# Altium PCB STM32F413Nucleo_NT35510__PCB_1.PcbDoc
Units mm, origin at the board's own origin, x right, y up, seen from the top; angles counter-clockwise.
Board outline 113.99 x 80.48 mm, 2 copper layers (Top Layer, Bottom Layer); 10 components, 29 nets, 162 pads, 0 vias.
Unrouted connection lines stored in the file: 54.
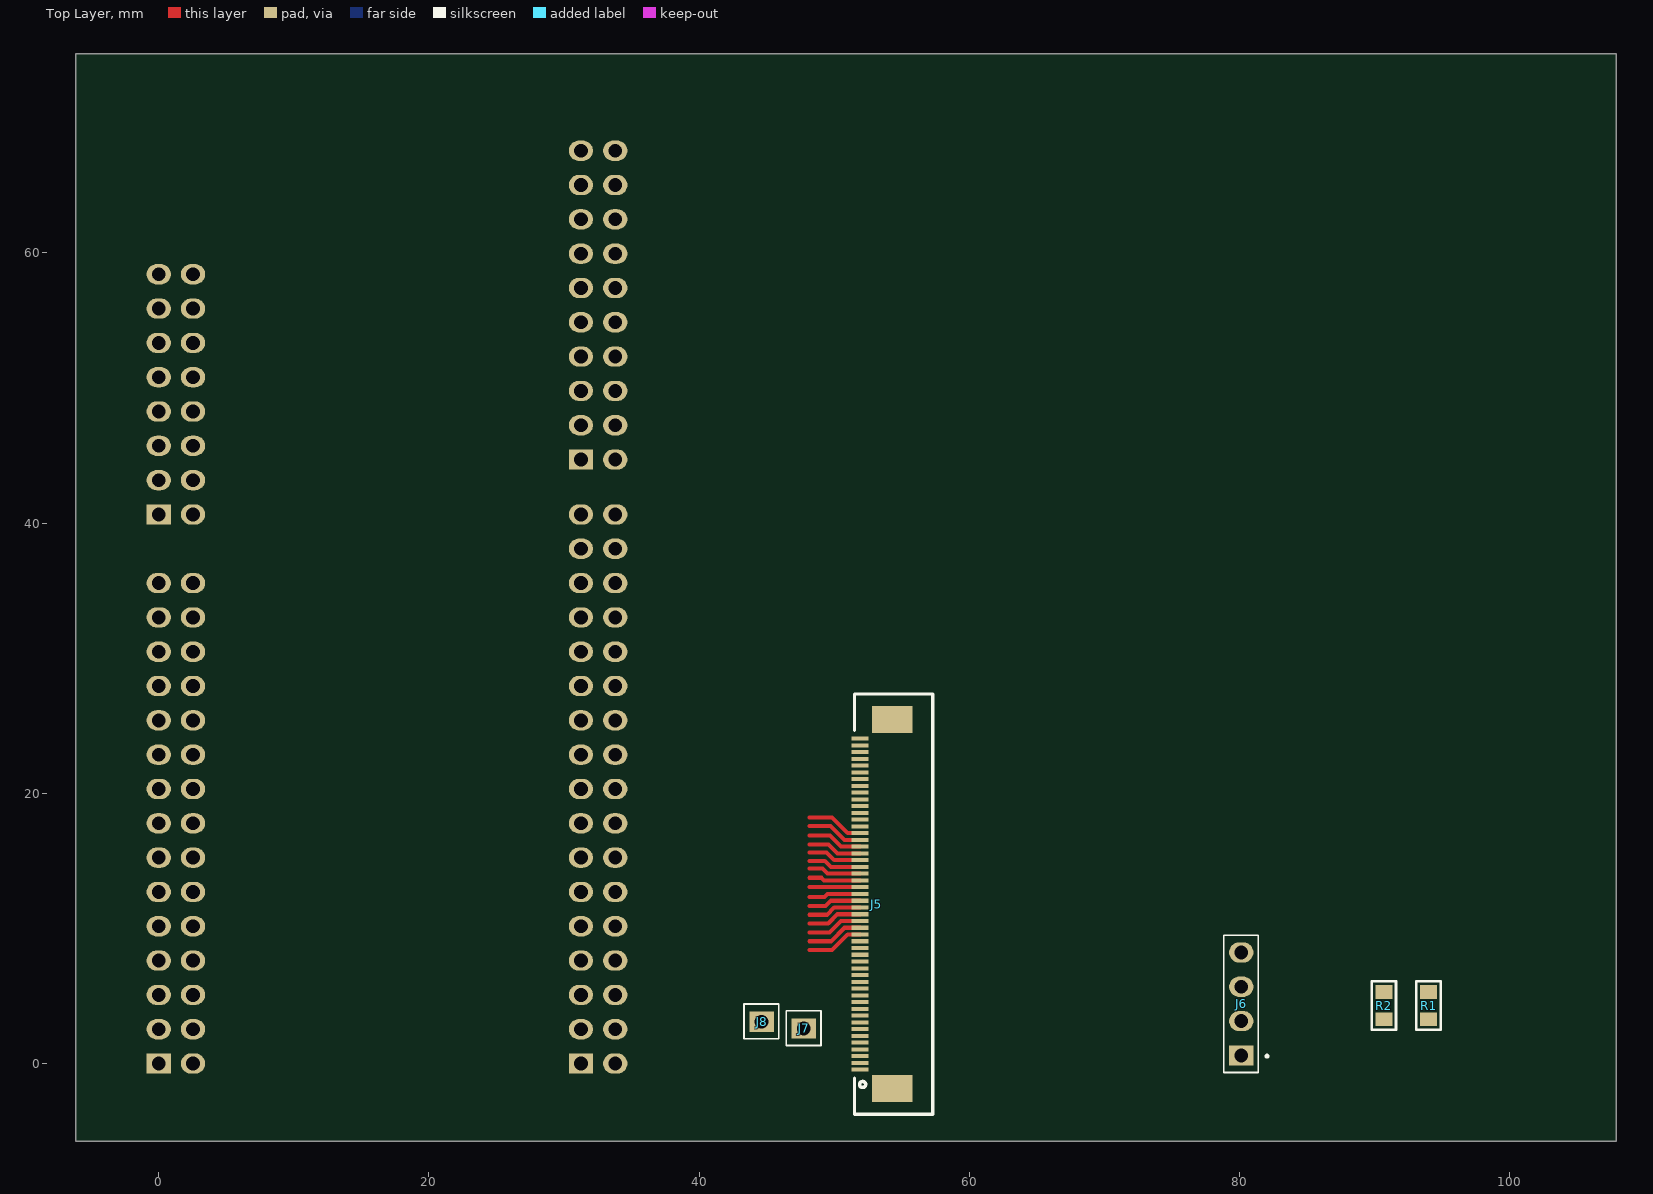
[diagram p0: Top Layer view]
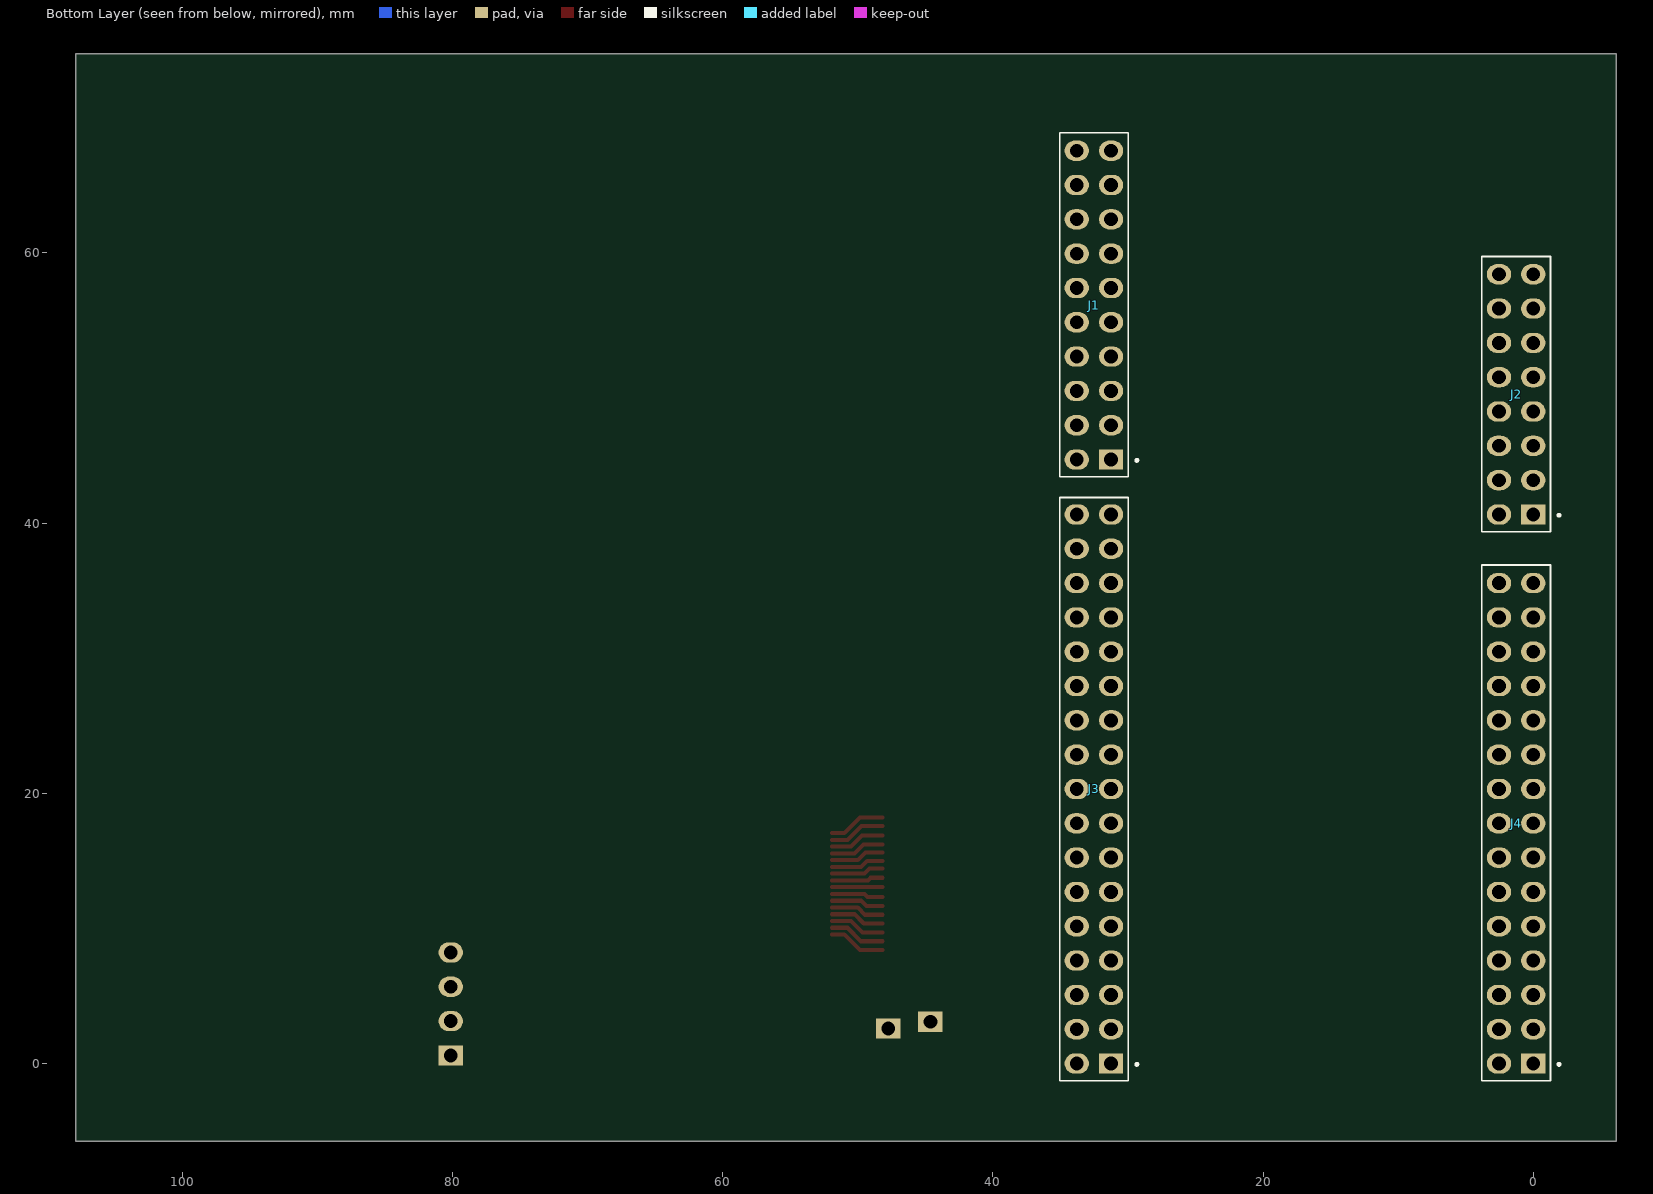
[diagram p1: Bottom Layer view, seen from below]

## Layer stack, top to bottom
Top Solder: solder mask 0.0102, Solder Resist, Dk 3.5
Top Layer: signal copper 0.0356
Dielectric 1: dielectric 0.32, FR-4, Dk 4.8
Bottom Layer: signal copper 0.0356
Bottom Solder: solder mask 0.0102, Solder Resist, Dk 3.5

## Board outline
-6.125,-5.75 107.867,-5.75 107.867,74.725 -6.125,74.725

## Design rules (kind name [scope] priority, off if disabled: settings)
Clearance [All] p1: gap=0.2
PolygonConnect [All] p1: connectstyle=Relief reliefconductorwidth=0.254 reliefentries=4 polygonreliefangle="90 Angle" airgapwidth=0.254
RoutingVias [All] p1: holewidth=0.711 width=1.27 viastyle="Through Hole" minholewidth=0.711 minwidth=1.27 maxholewidth=0.711 maxwidth=1.27
SolderMaskExpansion [All] p1: expansion=0.102
Width [All] p1: maxlimit=2 minlimit=0.254 preferedwidth=0.254
30 further rules are at their usual default settings.

## Components (designator, comment, footprint, x,y, rotation, side; value= is the part's Value field where it differs from the comment)
J1 "HEADER_2X10" HEADER_2X10 31.25,44.704 r90 bottom
J2 "HEADER_2X8" HEADER_2X8 0,40.64 r90 bottom
J3 "HEADER_2X17" HEADER_2X17 31.25,0 r90 bottom
J4 "HEADER_2X15" HEADER_2X15 0,0 r90 bottom
J5 "NT35510_Controller" ER-CON50HT-1 51.9,-0.45 r90 top
J6 "HEADER_1X4" HEADER_1X4 80.125,0.6 r90 top
J7 "HEADER 1X1" HEADER_1X1 47.75,2.6 r90 top
J8 "HEADER 1X1" HEADER_1X1 44.625,3.1 r90 top
R1 "Resistor 680R" RES_0805(2012) 93.99,4.294 r90 top
R2 "Resistor 680R" RES_0805(2012) 90.688,4.294 r90 top

## Footprints (in the part's own frame and the unit in brackets; to place one, negate y for a bottom-side part, rotate by r counter-clockwise, add the part's x,y. Pads: shape width x height; smd on the part's side, far side on the other; paste and mask are expansions set on the pad)
ER-CON50HT-1 [mm] "SMD FPC Connector, Pitch 0.5mm, Top Contact 50 P"
  rect 0.3x1.25 smd: 1(0,0) 2(0.5,0) 3(1,0) 4(1.5,0) 5(2,0) 6(2.5,0) 7(3,0) 8(3.5,0) 9(4,0) 10(4.5,0) 11(5,0) 12(5.5,0) 13(6,0) 14(6.5,0) 15(7,0) 16(7.5,0) 17(8,0) 18(8.5,0) 19(9,0) 20(9.5,0) 21(10,0) 22(10.5,0) 23(11,0) 24(11.5,0) 25(12,0) 26(12.5,0) 27(13,0) 28(13.5,0) 29(14,0) 30(14.5,0) 31(15,0) 32(15.5,0) 33(16,0) 34(16.5,0) 35(17,0) 36(17.5,0) 37(18,0) 38(18.5,0) 39(19,0) 40(19.5,0) 41(20,0) 42(20.5,0) 43(21,0) 44(21.5,0) 45(22,0) 46(22.5,0) 47(23,0) 48(23.5,0) 49(24,0) 50(24.5,0)
  rect 2x3 smd: 51(-1.4,-2.4) 52(25.9,-2.4)
  silkscreen extent -3.3,-5.4 27.8,0.4, body extent -3.07,-5.25 27.58,0.25, height 2.05
HEADER_1X1 [mm] "Male Header, Pitch 2.54mm, 1x1 Position"
  rect 1.5x1.8 hole 1.02: 1(0,0)
  silkscreen extent -1.27,-1.27 1.3,1.3, body extent -1.27,-1.27 1.27,1.27, height 9
HEADER_1X4 [mm] "Male Header, Pitch 2.54mm, 1x4 P"
  rect 1.5x1.8 hole 1.02: 1(0,0)
  oval 1.5x1.8 hole 1.02: 2(2.54,0) 3(5.08,0) 4(7.62,0)
  silkscreen extent -1.27,-1.96 8.9,1.3, body extent -1.27,-1.27 8.89,1.27, height 9
HEADER_2X8 [mm] "Male Header, Pitch 2.54mm, 2x8 P"
  oval 1.5x1.8 hole 1.02: 1(17.78,0) 2(17.78,2.54) 3(15.24,0) 4(15.24,2.54) 5(12.7,0) 6(12.7,2.54) 7(10.16,0) 8(10.16,2.54) 9(7.62,0) 10(7.62,2.54) 11(5.08,0) 12(5.08,2.54) 13(2.54,0) 14(2.54,2.54) 16(0,2.54)
  rect 1.5x1.8 hole 1.02: 15(0,0)
  silkscreen extent -1.27,-1.96 19.1,3.81, body extent -1.27,-1.27 19.05,3.81, height 9
HEADER_2X10 [mm] "Male Header, Pitch 2.54mm, 2x10 Position"
  oval 1.5x1.8 hole 1.02: 1(22.86,0) 2(22.86,2.54) 3(20.32,0) 4(20.32,2.54) 5(17.78,0) 6(17.78,2.54) 7(15.24,0) 8(15.24,2.54) 9(12.7,0) 10(12.7,2.54) 11(10.16,0) 12(10.16,2.54) 13(7.62,0) 14(7.62,2.54) 15(5.08,0) 16(5.08,2.54) 17(2.54,0) 18(2.54,2.54) 20(0,2.54)
  rect 1.5x1.8 hole 1.02: 19(0,0)
  silkscreen extent -1.27,-1.96 24.2,3.81, body extent -1.27,-1.27 24.13,3.81, height 9
HEADER_2X15 [mm] "Male Header, Pitch 2.54mm, 2x15 P"
  oval 1.5x1.8 hole 1.02: 1(35.56,0) 2(35.56,2.54) 3(33.02,0) 4(33.02,2.54) 5(30.48,0) 6(30.48,2.54) 7(27.94,0) 8(27.94,2.54) 9(25.4,0) 10(25.4,2.54) 11(22.86,0) 12(22.86,2.54) 13(20.32,0) 14(20.32,2.54) 15(17.78,0) 16(17.78,2.54) 17(15.24,0) 18(15.24,2.54) 19(12.7,0) 20(12.7,2.54) 21(10.16,0) 22(10.16,2.54) 23(7.62,0) 24(7.62,2.54) 25(5.08,0) 26(5.08,2.54) 27(2.54,0) 28(2.54,2.54) 30(0,2.54)
  rect 1.5x1.8 hole 1.02: 29(0,0)
  silkscreen extent -1.27,-1.96 36.9,3.81, body extent -1.27,-1.27 36.83,3.81, height 9
HEADER_2X17 [mm] "Male Header, Pitch 2.54mm, 2x17 Position"
  oval 1.5x1.8 hole 1.02: 1(40.64,0) 2(40.64,2.54) 3(38.1,0) 4(38.1,2.54) 5(35.56,0) 6(35.56,2.54) 7(33.02,0) 8(33.02,2.54) 9(30.48,0) 10(30.48,2.54) 11(27.94,0) 12(27.94,2.54) 13(25.4,0) 14(25.4,2.54) 15(22.86,0) 16(22.86,2.54) 17(20.32,0) 18(20.32,2.54) 19(17.78,0) 20(17.78,2.54) 21(15.24,0) 22(15.24,2.54) 23(12.7,0) 24(12.7,2.54) 25(10.16,0) 26(10.16,2.54) 27(7.62,0) 28(7.62,2.54) 29(5.08,0) 30(5.08,2.54) 31(2.54,0) 32(2.54,2.54) 34(0,2.54)
  rect 1.5x1.8 hole 1.02: 33(0,0)
  silkscreen extent -1.27,-1.96 41.9,3.81, body extent -1.27,-1.27 41.91,3.81, height 9
RES_0805(2012) [mm]
  rect 1x1.25 smd: 1(-1,0) 2(1,0)
  silkscreen extent -1.8,-0.9 1.8,0.9, body extent -1,-0.62 1,0.63, height 0.5

## Part data
J1: "Header, Dual row, 10-Pin"
J2: "Header, Dual row, 8-Pin"
J3: "Header, Dual row, 17-Pin"
J4: "Header, Dual row, 15-Pin"
J5: "NT35510 LCD Controller"
J6: "Header, Single row, 4-Pin"
J7 J8: "Header, Single row, 1-Pin"
R1 R2: "Resistor"

## Nets (pads, with @x,y where several pads share a name; then routed paths per layer and width w, separated by ;. In a path a pad name is that pad's centre, name@x,y a point inside that pad or via, vN(x,y) a via of type N, cw(c..) or ccw(c..) an arc to the next point about the centre after c; other vN are vias at no path point)
CS: J4.2 J5.42
D0: J1.16 J5.36 | length 4.2
  Top Layer w0.3: 48.175,18.205 49.845,18.205 51,17.05 J5.36
D1: J1.18 J5.35 | length 4.1
  Top Layer w0.3: 48.175,17.575 49.725,17.575 50.75,16.55 J5.35
D2: J2.8 J5.34 | length 4.1
  Top Layer w0.3: 48.175,16.875 49.675,16.875 50.5,16.05 J5.34
D3: J2.10 J5.33 | length 4
  Top Layer w0.3: 48.175,16.225 49.575,16.225 50.25,15.55 J5.33
D4: J3.20 J5.32 | length 4
  Top Layer w0.3: 48.175,15.625 49.425,15.625 50,15.05 J5.32
D5: J3.18 J5.31 | length 3.9
  Top Layer w0.3: 48.175,15 49.3,15 49.75,14.55 J5.31
D6: J3.4 J5.30 | length 3.9
  Top Layer w0.3: 48.175,14.425 49.125,14.425 49.5,14.05 J5.30
D7: J3.24 J5.29 | length 3.8
  Top Layer w0.3: 48.175,13.75 49.05,13.75 49.25,13.55 J5.29
D8: J3.6 J5.28 | length 3.7
  Top Layer w0.3: 48.175,13.05 J5.28
D9: J3.26 J5.27 | length 3.8
  Top Layer w0.3: 48.175,12.325 49.275,12.325 49.5,12.55 J5.27
D10: J3.10 J5.26 | length 3.9
  Top Layer w0.3: 48.175,11.665 49.365,11.665 49.75,12.05 J5.26
D11: J3.28 J5.25 | length 3.9
  Top Layer w0.3: 48.175,11.011 49.461,11.011 50,11.55 J5.25
D12: J3.30 J5.24 | length 4
  Top Layer w0.3: 48.175,10.357 49.557,10.357 50.25,11.05 J5.24
D13: J1.7 J5.23 | length 4.1
  Top Layer w0.3: 48.175,9.703 49.653,9.703 50.5,10.55 J5.23
D14: J5.22 J8.1 | length 4.1
  Top Layer w0.3: 48.175,9.049 49.749,9.049 50.75,10.05 J5.22
D15: J5.21 J7.1 | length 4.2
  Top Layer w0.3: 48.175,8.395 49.845,8.395 51,9.55 J5.21
GND: J2.11 J2.13 J5.5 J5.6 J5.7 J5.9 J5.10 J5.11 J5.12 J5.13 J5.14 J5.15 J5.16 J5.17 J5.18 J5.19 J5.20 J5.38 J5.45 J5.50 J5.51 J5.52 R1.2 R2.2
LEDK1: J5.2 R1.1
LEDK2: J5.3 R2.1
NOE: J4.8 J5.39
NWE: J4.6 J5.40
RS: J3.23 J5.41
RST: J1.1 J5.8
VCC: J2.7 J5.1 J5.4 J5.43 J5.44
XL: J5.48 J6.3
XR: J5.46 J6.1
YD: J5.47 J6.2
YU: J5.49 J6.4
pads on no net: J1.2 J1.3 J1.4 J1.5 J1.6 J1.8 J1.9 J1.10 J1.11 J1.12 J1.13 J1.14 J1.15 J1.17 J1.19 J1.20 J2.1 J2.2 J2.3 J2.4 J2.5 J2.6 J2.9 J2.12 J2.14 J2.15 J2.16 J3.1 J3.2 J3.3 J3.5 J3.7 J3.8 J3.9 J3.11 J3.12 J3.13 J3.14 J3.15 J3.16 J3.17 J3.19 J3.21 J3.22 J3.25 J3.27 J3.29 J3.31 J3.32 J3.33 J3.34 J4.1 J4.3 J4.4 J4.5 J4.7 J4.9 J4.10 J4.11 J4.12 J4.13 J4.14 J4.15 J4.16 J4.17 J4.18 J4.19 J4.20 J4.21 J4.22 J4.23 J4.24 J4.25 J4.26 J4.27 J4.28 J4.29 J4.30 J5.37